# EAGLE board riffleito-xbee (EAGLE 6.5.0)
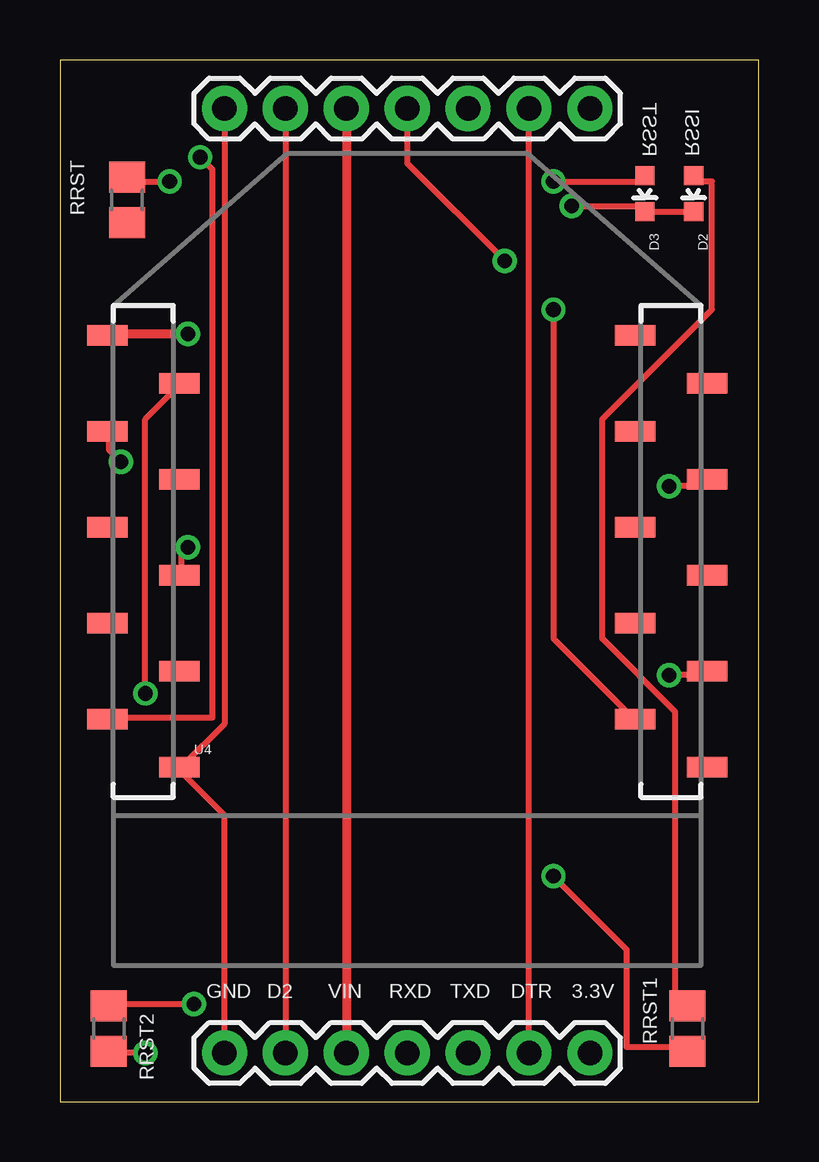
[diagram p0: board, top side]
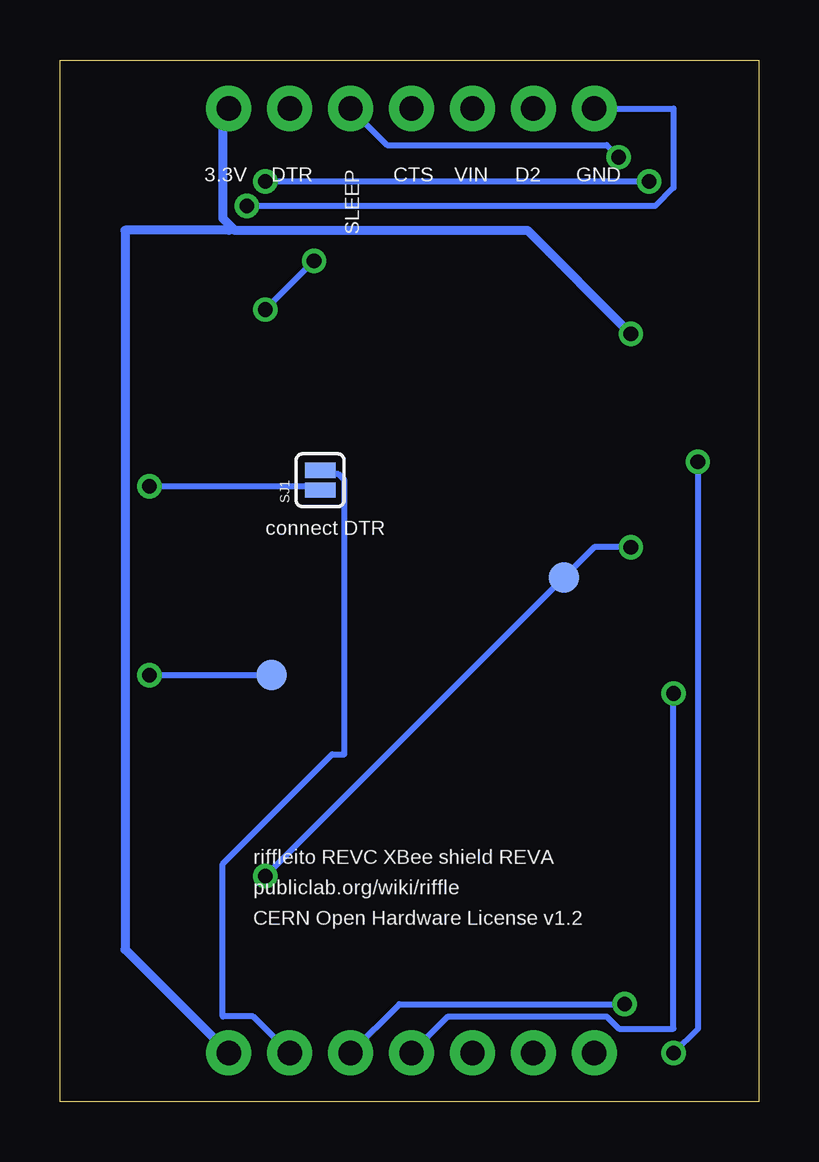
[diagram p1: board, bottom side, seen from below]

Size 29.13 x 43.42 mm. Coordinates in mm from the lower left corner, seen from the top.
Outline: 0,0 29.13,0 29.13,43.42 0,43.42 0,0
Copper layers (1*16): Top 0.035mm / dielectric 1.5mm / Bottom 0.035mm
Design rules "default": minimum track width 10mil, minimum drill 24mil, track to track 8mil, track to pad 8mil, pad to pad 8mil, via to via 8mil, smd to smd 8mil, copper to edge 40mil, drill to drill 8mil, minimum pad ring 10mil, minimum via ring 8mil, stop-mask expansion 4mil, vias tented up to drill 0mil, thermal gap 10mil
Net classes: 0 default: width 0.203 mm, drill 0.33 mm, clearance 0.203 mm; 1 power: width 0.381 mm, drill 0.33 mm, clearance 0.254 mm

## Footprints (pad centres in the part's own frame; a part is rotated, then mirrored left to right if it is on the bottom)
LED-0603 = smd 0.8 x 0.8: A 0,-0.75; C 0,0.75
1X07 = drill 1.016 pad 1.88: 1 0,0; 2 2.54,0; 3 5.08,0; 4 7.62,0; 5 10.16,0; 6 12.7,0; 7 15.24,0
R0805 = smd 1.3 x 1.5: 1 -0.95,0; 2 0.95,0
SJ_2S = smd 0.635 x 1.27: 1 -0.412,0; 2 0.412,0
PAD.03X.05 = smd 1.27 x 1.27: P$1 0,0
XBEE-SMD = smd 1.7 x 0.85: 1 -12.5,20; 2 -9.5,18; 3 -12.5,16; 4 -9.5,14; 5 -12.5,12; 6 -9.5,10; 7 -12.5,8; 8 -9.5,6; 9 -12.5,4; 10 -9.5,2; 11 12.5,2; 12 9.5,4; 13 12.5,6; 14 9.5,8; 15 12.5,10; 16 9.5,12; 17 12.5,14; 18 9.5,16; 19 12.5,18; 20 9.5,20

## Placement (x,y rotation side)
D2  Green  [LED-0603]  26.42,37.85 180 top
D3  Red  [LED-0603]  24.38,37.85 180 top
JP1  [1X07]  22.1,2.03 180 top
JP5  [1X07]  22.1,41.4 180 top
RRST  1K  [R0805]  2.79,37.59 90 top
RRST1  10K  [R0805]  26.16,3.05 90 top
RRST2  10K  [R0805]  2.03,3.05 270 top
SJ1  SOLDERJUMPERNC  [SJ_2S]  18.29,25.91 90 bottom
TP1  RSSI  [PAD.03X.05]  8.13,21.84 0 bottom
TP2  ON  [PAD.03X.05]  20.32,17.78 0 bottom
U4  XBEE-1B3  [XBEE-SMD]  14.48,11.94 0 top

## Library data of the parts
D2 D3 SJ1 TP1 TP2 U4 = SparkFun
JP1 JP5 = SparkFun-Connectors
RRST RRST1 RRST2 = rcl

## Nets
CTS: JP5.4 U4.12
D2: JP1.6 JP5.6
DTR: JP1.2 JP5.2 SJ1.2
GND: D2.C D3.C JP1.7 JP5.7 U4.10
N$1: TP2.P$1 U4.13
N$3: D2.A RRST1.2
N$4: RRST1.1 TP1.P$1 U4.6
N$6: D3.A RRST.2
N$7: RRST2.2 U4.3
N$13: SJ1.1 U4.17
RXD: JP1.4 U4.2
SLEEP_RQ: JP5.3 U4.9
TXD: JP1.3 RRST2.1
VCC [power]: JP1.1 JP5.1 U4.1
VIN [power]: JP1.5 JP5.5

## Tracks (layer width: path | path; a pad name or v marks a point on that pad's centre or on a via)
CTS  (via drill 0.61)
  Top 0.254: v20.57,33.02 20.57,19.3 23.88,16 U4.12 | v18.54,35.05 14.48,39.12 JP5.4
  Bottom 0.254: v18.54,35.05 v20.57,33.02
D2
  Top 0.254: JP5.6 JP1.6
DTR
  Top 0.254: JP1.2 JP5.2
  Bottom 0.254: JP1.2 21.08,3.56 22.35,3.56 22.35,9.91 17.78,14.48 17.27,14.48 17.27,25.91 17.53,26.16 18.29,26.16 SJ1.2
GND  (via drill 0.61)
  Top 0.254: JP1.7 6.86,11.94 5.08,13.72 U4.10 5.08,13.97 6.86,15.75 JP5.7 | D2.C 26.42,37.08 24.38,37.08 D3.C 24.38,37.34 v21.34,37.34
  Bottom 0.254: v21.34,37.34 4.32,37.34 3.56,38.1 3.56,41.4 JP5.7
N$1  (via drill 0.61)
  Top 0.254: v25.4,17.78 26.92,17.78 U4.13
  Bottom 0.254: v25.4,17.78 TP2.P$1
N$3
  Top 0.254: D2.A 26.42,38.35 27.18,38.35 27.18,33.02 22.61,28.45 22.61,19.3 25.65,16.26 25.65,4.57 26.16,4.06 RRST1.2
N$4  (via drill 0.61)
  Top 0.254: v5.33,23.11 5.08,22.86 5.08,22.1 U4.6 | v20.57,9.4 23.62,6.35 23.62,2.29 26.16,2.29 RRST1.1
  Bottom 0.254: v5.33,23.11 6.86,23.11 TP1.P$1 v20.57,9.4
N$6  (via drill 0.61)
  Top 0.254: v20.57,38.35 24.38,38.35 D3.A | v4.57,38.35 2.79,38.35 RRST.2
  Bottom 0.254: v4.57,38.35 v20.57,38.35
N$7  (via drill 0.61)
  Top 0.254: v3.56,2.03 2.03,2.03 RRST2.2 | v2.54,26.67 2.03,27.18 2.03,27.69 U4.3
  Bottom 0.254: v3.56,2.03 2.54,3.05 v2.54,26.67
N$13  (via drill 0.61)
  Top 0.254: v25.4,25.65 26.92,25.65 26.92,25.91 U4.17
  Bottom 0.254: v25.4,25.65 18.29,25.65 SJ1.1
RXD  (via drill 0.61)
  Top 0.254: v3.56,17.02 3.56,28.45 4.83,29.72 U4.2
  Bottom 0.254: v3.56,17.02 3.56,3.05 5.84,3.05 6.35,3.56 12.95,3.56 JP1.4
SLEEP_RQ  (via drill 0.61)
  Top 0.254: v5.84,39.37 6.35,38.86 6.35,16 2.03,16 U4.9
  Bottom 0.254: v5.84,39.37 6.35,39.88 15.49,39.88 JP5.3
TXD  (via drill 0.61)
  Top 0.254: v5.59,4.06 2.03,4.06 RRST2.1
  Bottom 0.254: v5.59,4.06 14.99,4.06 JP1.3
VCC  (via drill 0.61)
  Top 0.381: v5.33,32 2.03,32 U4.1
  Bottom 0.381: v5.33,32 9.65,36.32 21.84,36.32 21.97,36.45 | 21.97,36.45 22.35,36.83 22.35,41.4 JP5.1 | JP1.1 26.42,6.35 26.42,36.32 22.1,36.32 21.97,36.45
VIN
  Top 0.381: JP5.5 JP1.5

## Text on the board
tPlace: RSST | RSSI | GND | D2 | VIN | RXD | TXD | DTR | 3.3V
bPlace: GND | D2 | VIN | CTS | SLEEP | DTR | 3.3V | connect DTR | riffleito REVC XBee shield REVA | publiclab.org/wiki/riffle | CERN Open Hardware License v1.2